# Altium PCB PCB1.pcbdoc
Units mil, origin at the board's own origin, x right, y up, seen from the top; angles counter-clockwise.
Board outline 6000 x 4000 mil, 2 copper layers (Top Layer, Bottom Layer); 16 components, 16 nets, 60 pads, 79 vias.
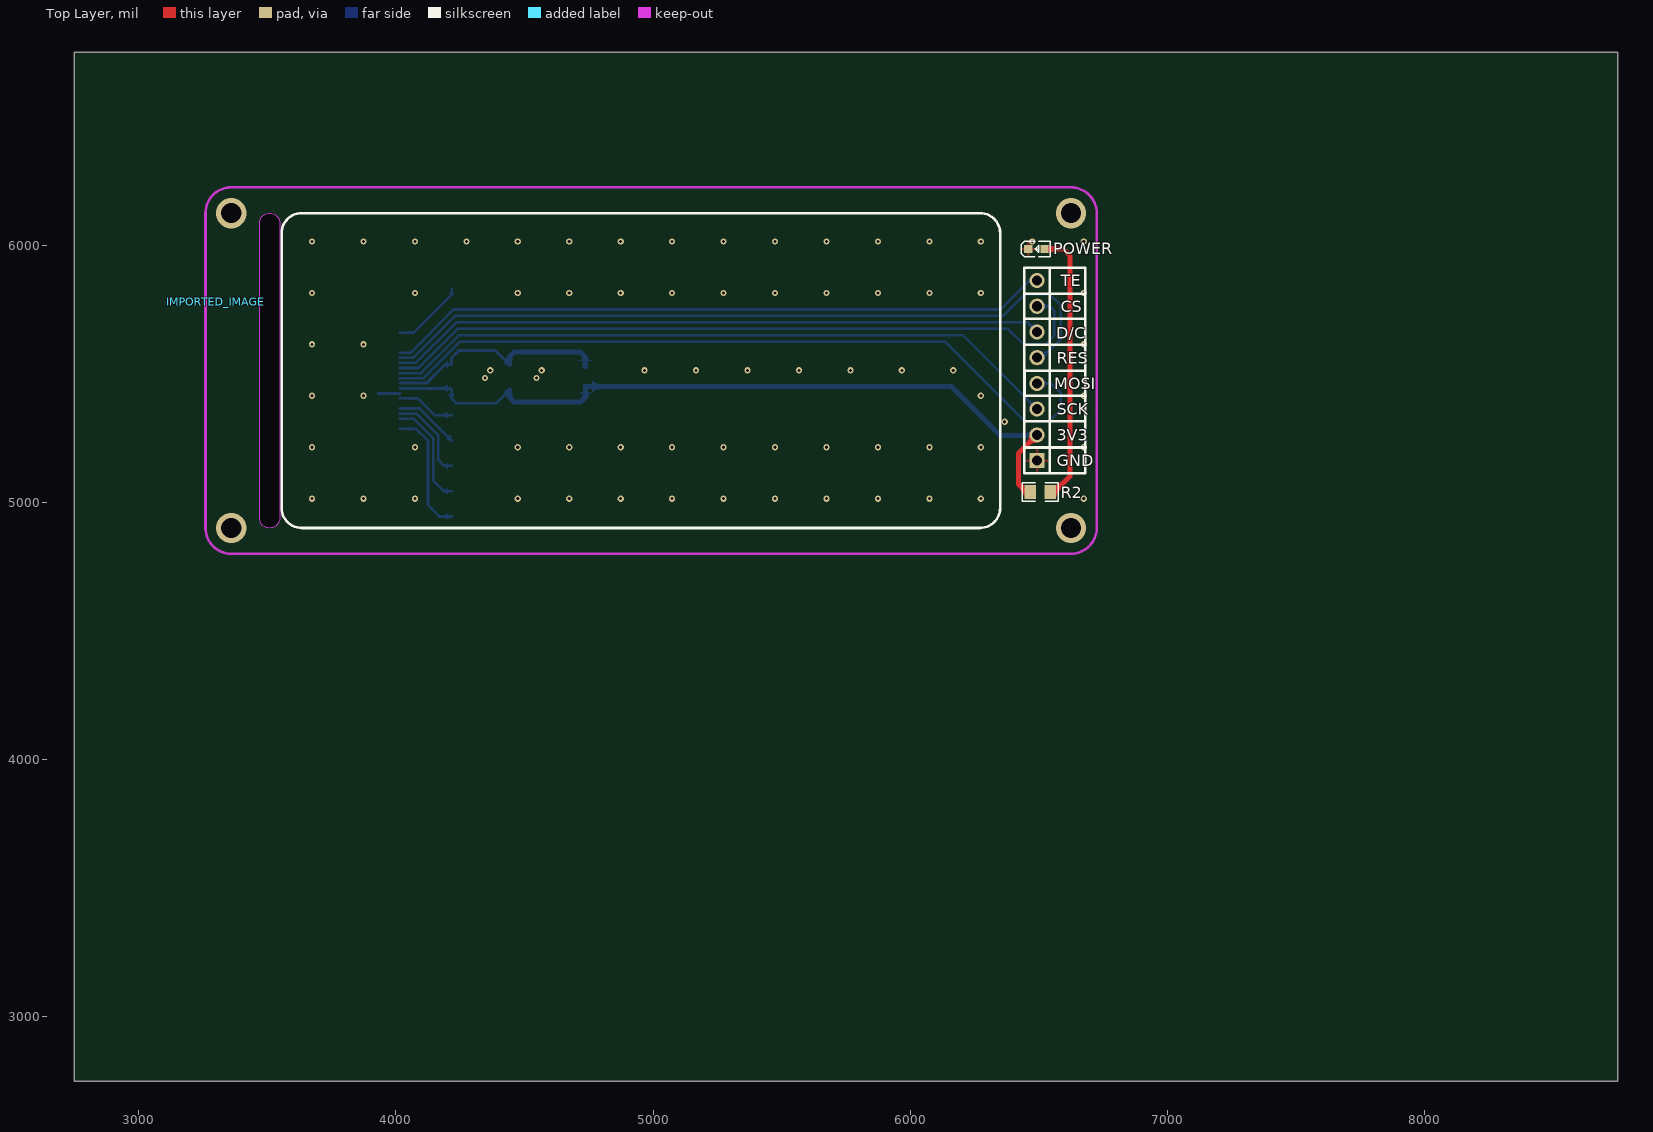
[diagram p0: Top Layer view]
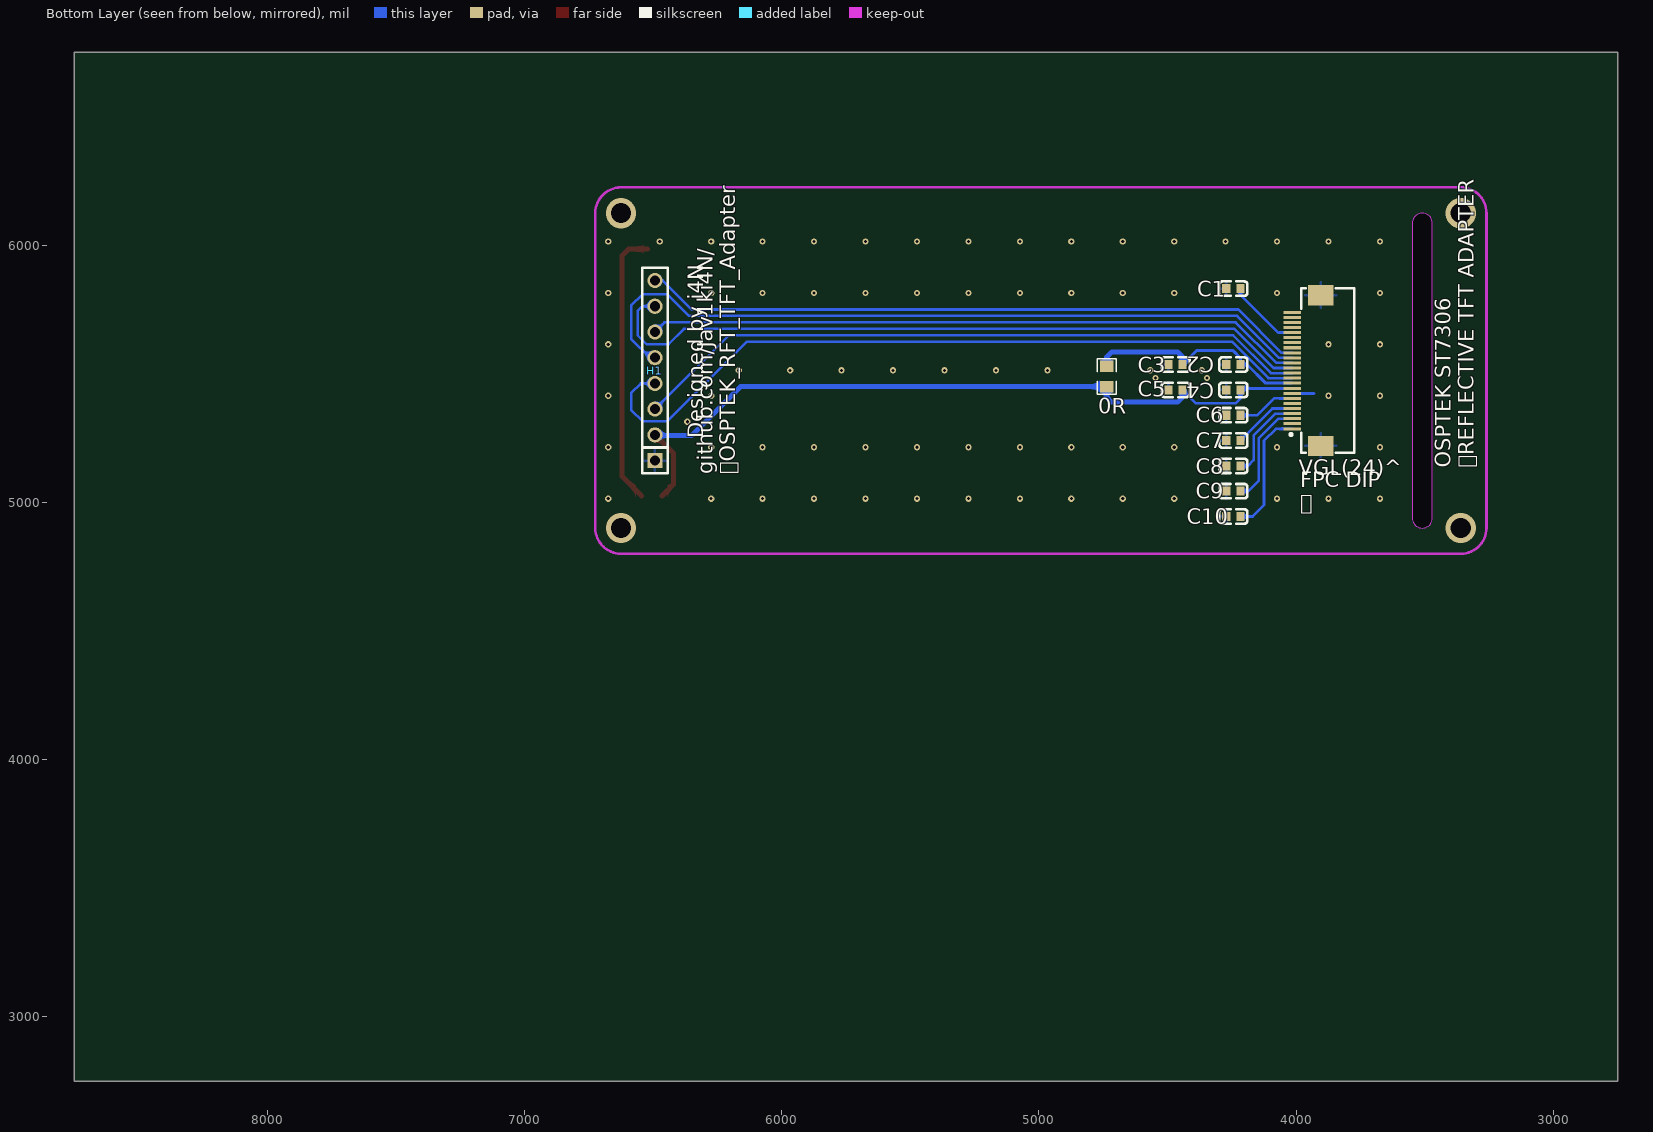
[diagram p1: Bottom Layer view, seen from below]

## Layer stack, top to bottom
Top Layer: signal copper (thickness not stored)
Dielectric: dielectric 12.6, FR-4, Dk 4.8
Bottom Layer: signal copper (thickness not stored)

## Board outline
8750,2750 2750,2750 2750,6750 8750,6750
cut-out: 3509.37,6125 cw(c3509.37,6085.63) 3548.74,6085.63 3548.74,4939.96 cw(c3509.37,4939.96) 3509.37,4900.59 cw(c3509.37,4939.96) 3470,4939.96 3470,6085.63 cw(c3509.37,6085.63)

## Design rules (kind name [scope] priority, off if disabled: settings)
Clearance copperThickness1oz [All] p1: gap=7 ignorepadtopadclearanceinfootprint=FALSE except(4: Track-Track; 6: Track-SMDPad SMDPad-SMDPad Track-THPad SMDPad-THPad THPad-THPad Track-Via SMDPad-Via THPad-Via Via-Via SMDPad-Fill THPad-Fill Via-Fill Fill-Fill Track-Region SMDPad-Region THPad-Region Via-Region Region-Region Track-Poly SMDPad-Poly THPad-Poly Via-Poly Fill-Poly Region-Poly Poly-Poly Track-Text SMDPad-Text THPad-Text Via-Text Fill-Text Region-Text Poly-Text Text-Text; 6.9: Track-Hole SMDPad-Hole THPad-Hole Via-Hole Fill-Hole Region-Hole Poly-Hole Text-Hole Sheet-Hole; 11.8: Track-Fill Fill-Region Track-Sheet SMDPad-Sheet THPad-Sheet Via-Sheet Fill-Sheet Region-Sheet Poly-Sheet Text-Sheet)
Clearance copperThickness2oz [All] p1: gap=7 ignorepadtopadclearanceinfootprint=FALSE except(6: Track-SMDPad SMDPad-SMDPad Track-THPad SMDPad-THPad THPad-THPad Track-Via SMDPad-Via THPad-Via Via-Via SMDPad-Fill THPad-Fill Via-Fill Fill-Fill Track-Region SMDPad-Region THPad-Region Via-Region Region-Region Track-Poly SMDPad-Poly THPad-Poly Via-Poly Fill-Poly Region-Poly Poly-Poly Track-Text SMDPad-Text THPad-Text Via-Text Fill-Text Region-Text Poly-Text Text-Text; 6.9: Track-Hole SMDPad-Hole THPad-Hole Via-Hole Fill-Hole Region-Hole Poly-Hole Text-Hole Sheet-Hole; 8: Track-Track; 11.8: Track-Fill Fill-Region Track-Sheet SMDPad-Sheet THPad-Sheet Via-Sheet Fill-Sheet Region-Sheet Poly-Sheet Text-Sheet)
DiffPairsRouting differentialPair [All] p1: maxuncoupledlength=10 maxlimit=6 mostfreqgap=6 toplayer_minwidth=5 toplayer_prefwidth=10 toplayer_maxwidth=100 bottomlayer_minwidth=5 bottomlayer_prefwidth=10 bottomlayer_maxwidth=100
PasteMaskExpansion pasteMaskExpansion [All] p1:
PlaneConnect innerPlane [All] p1: planeconnectstyle=Relief reliefexpansion=20 reliefentries=4 reliefconductorwidth=10 reliefairgap=10
PolygonConnect copperRegion [All] p1: connectstyle=Relief reliefentries=4 reliefconductorwidth=10 polygonreliefangle="90 Angle" airgapwidth=10
RoutingVias viaSize [All] p1: viastyle="Through Hole" holewidth=12.0078 minholewidth=11.811 maxholewidth=248.0314 width=24.0158 minwidth=19.685 maxwidth=393.7008
SolderMaskExpansion solderMaskExpansion [All] p1: useseparateexpansions=TRUE expansion=2 expansionbottom=2
Width copperThickness1oz [All] p1: maxlimit=100 minlimit=5 preferedwidth=10
Width copperThickness2oz [All] p1: maxlimit=100 minlimit=8 preferedwidth=10

## Components (designator, comment, footprint, x,y, rotation, side; value= is the part's Value field where it differs from the comment)
0R "0805W8F0000T5E" R0805 4736.38,5490 r270 bottom
C1 "CL10B105KA8NNNC" C0603 4244.25,5831.3 r0 bottom
C2 "0603B104K500NT" C0603 4244.25,5536.02 r0 bottom
C3 "CL10B105KA8NNNC" C0603 4468.66,5536.02 r0 bottom
C4 "0603B104K500NT" C0603 4244.25,5437.6 r0 bottom
C5 "CL10B105KA8NNNC" C0603 4468.66,5437.6 r0 bottom
C6 "CL10B105KA8NNNC" C0603 4244.25,5339.17 r0 bottom
C7 "CL10B105KA8NNNC" C0603 4244.25,5240.75 r0 bottom
C8 "CL10B105KA8NNNC" C0603 4244.25,5142.32 r0 bottom
C9 "CL10B105KA8NNNC" C0603 4244.25,5043.9 r0 bottom
C10 "CL10B105KA8NNNC" C0603 4244.25,4945.47 r0 bottom
"FPC DIP /  " "FPC-05F-24PH20" FPC-SMD_24P-P0.50_FPC-05F-24PH20 3955,5512.8 r90 bottom (schematic designator "FPC DIP")
H1 "B-2100S08P-A110" HDR-TH_8P-P2.54-V-M 6492.87,5512.8 r90 bottom
IMPORTED_IMAGE "IMPORTED_IMAGE" IMPORTED_IMAGE 3299.52,5780 r0 top
POWER "LTST-C191KSKT" LED0603-RD-YELLOW 6490,5985 r0 top
R2 "FRR0805J102 TS" R0805 6505,5040.59 r180 top

## Footprints (in the part's own frame and the unit in brackets; to place one, negate y for a bottom-side part, rotate by r counter-clockwise, add the part's x,y. Pads: shape width x height; smd on the part's side, far side on the other; paste and mask are expansions set on the pad)
C0603 [mm]
  rect 0.8x0.9 smd: 1(-0.7,0) 2(0.7,0)
  silkscreen extent -1.39,-0.71 1.39,0.71
FPC-SMD_24P-P0.50_FPC-05F-24PH20 [mm]
  rect 0.3x1.75 smd: 1(-5.753,1.537) 2(-5.25,1.537) 3(-4.75,1.537) 4(-4.25,1.537) 5(-3.75,1.537) 6(-3.25,1.537) 7(-2.75,1.537) 8(-2.25,1.537) 9(-1.75,1.537) 10(-1.25,1.537) 11(-0.75,1.537) 12(-0.25,1.537) 13(0.25,1.537) 14(0.75,1.537) 15(1.245,1.537) 16(1.753,1.537) 17(2.25,1.537) 18(2.75,1.537) 19(3.25,1.537) 20(3.75,1.537) 21(4.25,1.537) 22(4.75,1.537) 23(5.25,1.537) 24(5.75,1.537)
  rect 2x2.5 smd: 25(7.44,-1.288) 26(-7.44,-1.288)
  silkscreen extent -8.13,-4.57 8.13,1.78
HDR-TH_8P-P2.54-V-M [mm]
  rect 1.5x1.5 hole 1: 1(-8.89,0)
  round 1.5 hole 1: 2(-6.35,0) 3(-3.81,0) 4(-1.27,0) 5(1.27,0) 6(3.81,0) 7(6.35,0) 8(8.89,0)
  silkscreen extent -10.16,-1.27 10.16,1.27
IMPORTED_IMAGE [mil]
LED0603-RD-YELLOW [mm]
  rect 0.8x0.8 smd: 1(-0.799,-0.003) 2(0.799,0.003)
  silkscreen extent -1.49,-0.75 1.39,0.76
R0805 [mm]
  rect 1.133x1.377 smd: 1(-1,0) 2(1,0)
  silkscreen extent -1.76,-0.92 1.76,0.92

## Via types
v1: diameter 24.02, hole 12.01, Top Layer to Bottom Layer, 75 vias
v2: diameter 118.11, hole 78.74, Top Layer to Bottom Layer, 4 vias

## Nets (pads, with @x,y where several pads share a name; then routed paths per layer and width w, separated by ;. In a path a pad name is that pad's centre, name@x,y a point inside that pad or via, vN(x,y) a via of type N, cw(c..) or ccw(c..) an arc to the next point about the centre after c; other vN are vias at no path point)
$1N4245: POWER.2 R2.1 | length 1075.3
  Top Layer w19.68: POWER.2 6521.61,5985 6595,5985 6620,5960 6620,5100.63 R2.1@6544.37,5025
AVDD: "FPC DIP /  .4" C8.1 | length 341
  Bottom Layer w10: 4015.51,5345.47 4015.98,5345 4080,5345 4165,5260 4165,5165 4187.68,5142.32 C8.1
GND: 
IOVCC: 0R.1 "FPC DIP /  .10" C2.1 C3.1 | length 892.2
  Bottom Layer w11.81: 4015.51,5463.58 4118.58,5463.58 4191.02,5536.02 C2.1 4216.69,5561.69 4245,5590 4387.13,5590 C3.1
  Bottom Layer w19.68: C3.1 4441.1,5565.31 4460.79,5585 4716.69,5585 4736.38,5565.31 0R.1
LCD_CS: "FPC DIP /  .13" H1.7 | length 2816.4
  Bottom Layer w10: 4015.51,5522.63 4087.63,5522.63 4240,5675 6380,5675 6440,5615 6525,5615 6560,5650 6560,5745 6542.2,5762.8 H1.7
LCD_D/C: "FPC DIP /  .14" H1.6 | length 2558.1
  Bottom Layer w10: 4015.51,5542.32 4077.32,5542.32 4235,5700 6455.67,5700 H1.6
LCD_RES: "FPC DIP /  .15" H1.5 | length 2942.9
  Bottom Layer w10: 4015.51,5561.8 4066.8,5561.8 4230,5725 6360,5725 6445,5810 6540,5810 6585,5765 6585,5635.18 6512.62,5562.8 H1.5
LCD_SCLK: "FPC DIP /  .12" H1.3 | length 2657.2
  Bottom Layer w10: 4015.51,5502.95 4097.95,5502.95 4245,5650 6205,5650 6492.2,5362.8 H1.3
LCD_SDI: "FPC DIP /  .11" H1.4 | length 2948
  Bottom Layer w10: 4015.51,5483.26 4108.26,5483.26 4250,5625 6135,5625 6445,5315 6540,5315 6585,5360 6585,5425 6547.2,5462.8 H1.4
TE: "FPC DIP /  .16" H1.8 | length 2593.8
  Bottom Layer w10: 4015.51,5581.8 4056.8,5581.8 4225,5750 6350,5750 6462.8,5862.8 H1.8
VCC: 0R.2 "FPC DIP /  .9" C4.1 C5.1 H1.2 R2.2 | length 2997.4
  Top Layer w19.68: R2.2@6465.63,5025 6420,5070.63 6420,5190 H1.2@6492.8,5262.8
  Bottom Layer w10: C4.1 4216.69,5403.31 4235,5385 4388.5,5385 C5.1
  Bottom Layer w11.81: 4015.51,5443.89 4210.4,5443.89 C4.1
  Bottom Layer w19.68: C5.1 4441.1,5409.69 4460.79,5390 4717.81,5390 4737.5,5409.69 4737.5,5449.51 0R.2 6159.37,5450.63 6350,5260 6490.08,5260 H1.2
VCCIO: "FPC DIP /  .20" C1.1 | length 286.4
  Bottom Layer w10: 4015.51,5660.43 4070.43,5660.43 4216.69,5806.69 C1.1
VGH: "FPC DIP /  .7" C6.1 | length 228.2
  Bottom Layer w10: 4015.51,5404.52 4085.48,5404.52 4150.83,5339.17 C6.1
VGL: "FPC DIP /  .1" C10.1 | length 488.8
  Bottom Layer w10: 4015.5,5286.3 4078.7,5286.3 4125,5240 4125,4990 4169.53,4945.47 C10.1
VIV: "FPC DIP /  .5" C7.1 | length 252.7
  Bottom Layer w10: 4015.51,5365.15 4092.29,5365.15 C7.1
VNV: "FPC DIP /  .3" C9.1 | length 414.6
  Bottom Layer w10: 4015.51,5325.78 4069.22,5325.78 4145,5250 4145,5085 4186.1,5043.9 C9.1
pads on no net: "FPC DIP /  .2" "FPC DIP /  .6" "FPC DIP /  .8" "FPC DIP /  .17" "FPC DIP /  .18" "FPC DIP /  .19" "FPC DIP /  .21" "FPC DIP /  .22" "FPC DIP /  .23" "FPC DIP /  .24" "FPC DIP /  .25" "FPC DIP /  .26" C1.2 C2.2 C3.2 C4.2 C5.2 C6.2 C7.2 C8.2 C9.2 C10.2 H1.1 POWER.1
copper on no net: | length 85.5
  Bottom Layer w11.81: 3930,5424.21 4015.51,5424.21
  other v1: 3674.1,5014.69 3874.1,5014.69 4074.1,5014.69 4474.1,5014.69 4674.1,5014.69 4874.1,5014.69 5074.1,5014.69 5274.1,5014.69 5474.1,5014.69 5674.1,5014.69 5874.1,5014.69 6074.1,5014.69 6274.1,5014.69 6674.1,5014.69 3674.1,5214.69 4074.1,5214.69 4474.1,5214.69 4674.1,5214.69 4874.1,5214.69 5074.1,5214.69 5274.1,5214.69 5474.1,5214.69 5674.1,5214.69 5874.1,5214.69 6074.1,5214.69 6274.1,5214.69 6674.1,5214.69 6366.95,5313.66 3674.1,5414.69 3874.1,5414.69 6274.1,5414.69 6674.1,5414.69 4347.19,5483.94 4547.19,5483.94 4366.95,5513.66 4566.95,5513.66 4966.95,5513.66 5166.95,5513.66 5366.95,5513.66 5566.95,5513.66 5766.95,5513.66 5966.95,5513.66 6166.95,5513.66 3674.1,5614.69 3874.1,5614.69 6674.1,5614.69 3674.1,5814.69 4074.1,5814.69 4474.1,5814.69 4674.1,5814.69 4874.1,5814.69 5074.1,5814.69 5274.1,5814.69 5474.1,5814.69 5674.1,5814.69 5874.1,5814.69 6074.1,5814.69 6274.1,5814.69 6674.1,5814.69 3674.1,6014.69 3874.1,6014.69 4074.1,6014.69 4274.1,6014.69 4474.1,6014.69 4674.1,6014.69 4874.1,6014.69 5074.1,6014.69 5274.1,6014.69 5474.1,6014.69 5674.1,6014.69 5874.1,6014.69 6074.1,6014.69 6274.1,6014.69 6474.1,6014.69 6674.1,6014.69
  other v2: 3360,4900.59 6624.57,4900.59 3360,6125 6624.57,6125

## Polygon pours and split planes (outlines as drawn)
no net on Top Layer (solid, remove dead copper): 3000,4505 7020,4505 7020,6500 3000,6500
no net on Bottom Layer (solid, remove dead copper, pour order 2): 3055,4475 6825,4475 6825,6470 3055,6470

## Keep-outs
Board Outline Layer:
  lines w10: 3260,4900.59 ccw(c3360,4900.59) 3360,4800.59 6624.57,4800.59 ccw(c6624.57,4900.59) 6724.57,4900.59 6724.57,6125 ccw(c6624.57,6125) 6624.57,6225 3360,6225 ccw(c3360,6125) 3260,6125 3260,4900.59
Multi-Layer:
  region: 3509.37,6125 cw(c3509.37,6085.63) 3548.74,6085.63 3548.74,4939.96 cw(c3509.37,4939.96) 3509.37,4900.59 cw(c3509.37,4939.96) 3470,4939.96 3470,6085.63 cw(c3509.37,6085.63)

## Other copper
Top Layer:
  region net VCC: 6471.23,5227.31 6457.37,5241.29 6459.46,5243.77 6460.96,5246.36 6461.97,5249.06 6462.61,5251.89 6462.96,5254.85 6463.14,5257.93 6463.4,5264.49 6494.46,5233.31 6487.9,5233.07 6484.81,5232.9 6481.85,5232.54 6479.01,5231.91 6476.3,5230.9 6473.71,5229.4
  region net $1N4245: 6566.75,5994.84 6566.75,5975.16 ccw(c6566.75,5896.73) 6537.22,5969.39 6537.22,6000.88 ccw(c6566.75,6070.03)
  region net VCC: 6427.8,5048.91 6426.96,5077.59 ccw(c6455.19,5105.82) 6443.34,5067.7 6443.34,5022.69 ccw(c6384.34,5005.45)
  region net $1N4245: 6590.78,5085.33 6582.2,5048.91 ccw(c6625.66,5005.45) 6566.66,5022.69 6566.66,5067.7 ccw(c6521.93,5154.19)
Bottom Layer:
  region net VCC: 6454.69,5250.16 6450.52,5269.84 6452.15,5269.92 6453.71,5270.13 6456.64,5270.96 6459.37,5272.24 6461.93,5273.9 6464.35,5275.87 6466.67,5278.07 6471.19,5282.84 6475.36,5239.02 6470.26,5243.11 6467.97,5244.99 6465.71,5246.68 6463.36,5248.1 6460.82,5249.2 6457.97,5249.91
  region net LCD_SCLK: 6460.72,5387.21 6467.29,5394.78 6468.93,5393.28 6470.49,5392.12 6472,5391.27 6473.47,5390.69 6474.91,5390.34 6476.35,5390.2 6479.28,5390.37 6482.38,5390.95 6485.79,5391.64 6489.63,5392.18 6491.76,5392.31 6494.04,5392.3 6463.42,5360.68 6463.34,5362.99 6463.41,5365.13 6463.89,5368.96 6465.14,5375.35 6465.33,5378.2 6465.19,5379.61 6464.85,5381.03 6464.27,5382.48 6463.41,5383.98 6462.24,5385.55
  region net LCD_SDI: 6533.23,5467.8 6533.23,5457.8 6531,5457.7 6529.07,5457.41 6527.4,5456.95 6525.95,5456.33 6524.7,5455.56 6523.59,5454.66 6521.68,5452.48 6518.01,5447.03 6515.65,5443.96 6514.22,5442.38 6512.56,5440.79 6512.56,5484.8 6514.22,5483.21 6515.65,5481.63 6518.01,5478.56 6521.68,5473.11 6523.59,5470.93 6524.7,5470.03 6525.95,5469.26 6527.4,5468.64 6529.07,5468.18 6531,5467.89
  region net LCD_RES: 6533.45,5590.7 6530.77,5573.88 6529.48,5572.47 6528.34,5571 6526.45,5567.89 6524.96,5564.61 6523.7,5561.21 6521.31,5554.24 6519.87,5550.78 6518.08,5547.41 6505.36,5589.55 6508.91,5588.08 6512.62,5586.91 6516.4,5586.14 6520.16,5585.83 6523.83,5586.06 6525.61,5586.39 6527.33,5586.89 6528.98,5587.56 6530.56,5588.42 6532.05,5589.46
  region net LCD_D/C: 6460.8,5687.79 6467.87,5694.87 6469.52,5693.36 6471.09,5692.19 6472.59,5691.34 6474.05,5690.76 6475.49,5690.41 6476.91,5690.27 6479.8,5690.45 6486.25,5691.71 6490.09,5692.22 6492.22,5692.32 6494.52,5692.28 6463.39,5661.15 6463.35,5663.45 6463.45,5665.58 6463.96,5669.42 6465.21,5675.87 6465.4,5678.76 6465.26,5680.18 6464.91,5681.62 6464.33,5683.08 6463.48,5684.58 6462.31,5686.15
  region net LCD_CS: 6533.23,5767.8 6533.23,5757.8 6531,5757.7 6529.07,5757.41 6527.4,5756.95 6525.95,5756.33 6524.7,5755.56 6523.59,5754.66 6521.68,5752.48 6518.01,5747.03 6515.65,5743.96 6514.22,5742.38 6512.56,5740.79 6512.56,5784.8 6514.22,5783.21 6515.65,5781.63 6518.01,5778.56 6521.68,5773.11 6523.59,5770.93 6524.7,5770.03 6525.95,5769.26 6527.4,5768.64 6529.07,5768.18 6531,5767.89
  region net TE: 6462.8,5857.8 6462.8,5867.8 6463.91,5867.94 6464.88,5868.35 6465.72,5869 6466.44,5869.85 6467.63,5872.06 6468.6,5874.7 6469.49,5877.55 6470.46,5880.35 6471.64,5882.85 6472.36,5883.91 6473.19,5884.8 6473.19,5840.79 6472.36,5841.68 6471.64,5842.74 6470.46,5845.24 6469.49,5848.04 6468.6,5850.89 6467.63,5853.53 6466.44,5855.74 6465.72,5856.59 6464.88,5857.24 6463.91,5857.65
  region net VCC: 4747.34,5409.69 4727.66,5409.69 ccw(c4708.49,5409.69) 4712.89,5428.34 4762.11,5428.34 ccw(c4766.51,5409.69)
  region net VCC: 4793.01,5460.47 4793.01,5440.79 ccw(c4793.01,5399.55) 4763.48,5428.34 4763.48,5472.92 ccw(c4793.01,5501.71)
  region net IOVCC: 4726.54,5565.31 4746.22,5565.31 ccw(c4760.98,5566.47) 4760.98,5551.66 4711.77,5551.66 ccw(c4711.77,5566.47)
  region net VGL: 4064.95,5291.3 4064.95,5281.3 ccw(c4064.95,5156.6) 4049.95,5280.39 4049.95,5292.2 ccw(c4064.95,5415.99)
  region net VGH: 4064.96,5409.52 4064.96,5399.52 ccw(c4064.96,5274.83) 4049.96,5398.61 4049.96,5410.43 ccw(c4064.96,5534.21)
  region net VCCIO: 4064.96,5665.43 4064.96,5655.43 ccw(c4064.96,5530.74) 4049.96,5654.52 4049.96,5666.34 ccw(c4064.96,5790.12)
  region net VCCIO: 4221.69,5806.69 4211.69,5806.69 ccw(c4204.19,5806.06) 4204.19,5813.58 4229.19,5813.58 ccw(c4229.19,5806.06)
  region net IOVCC: 4191.02,5530.12 4191.02,5541.93 ccw(c4191.02,5551.91) 4200.94,5550.79 4200.94,5521.26 ccw(c4191.02,5520.13)
  region net IOVCC: 4419.09,5549.68 4425.47,5560 ccw(c4444.26,5585.06) 4444.27,5553.74 4425.35,5530.89 ccw(c4394.04,5530.89)
  region net IOVCC: 4431.26,5565.31 4450.94,5565.31 ccw(c4465.24,5565.31) 4456.85,5553.74 4425.35,5553.74 ccw(c4416.96,5565.31)
  region net VCC: 4183.23,5437.98 4183.23,5449.8 ccw(c4183.23,5480.99) 4200.94,5455.31 4200.94,5429.13 ccw(c4183.23,5415.84)
  region net VCC: 4221.69,5404.88 4211.69,5404.88 ccw(c4192.94,5404.88) 4204.19,5419.88 4229.19,5419.88 ccw(c4240.44,5404.88)
  region net VCC: 4425.15,5414.58 4420.05,5423.62 ccw(c4398.84,5439.53) 4425.35,5439.53 4441.06,5419.88 ccw(c4441.06,5393.37)
  region net VCC: 4450.94,5409.69 4431.26,5409.69 ccw(c4419.5,5409.69) 4425.35,5419.88 4456.85,5419.88 ccw(c4462.7,5409.69)
  region net VGH: 4185.94,5334.17 4185.94,5344.17 ccw(c4185.94,5362.92) 4200.94,5351.67 4200.94,5326.67 ccw(c4185.94,5315.42)
  region net VIV: 4195.64,5254.73 4200.74,5263.77 ccw(c4216.65,5284.98) 4216.65,5258.46 4200.94,5238.82 ccw(c4174.43,5238.82)
  region net AVDD: 4187.68,5137.32 4187.68,5147.32 ccw(c4187.68,5162.81) 4200.94,5154.82 4200.94,5129.82 ccw(c4187.68,5121.84)
  region net VNV: 4186.1,5038.9 4186.1,5048.9 ccw(c4186.1,5067.33) 4200.94,5056.4 4200.94,5031.4 ccw(c4186.1,5020.46)
  region net VGL: 4185.94,4940.47 4185.94,4950.47 ccw(c4185.94,4969.22) 4200.94,4957.97 4200.94,4932.97 ccw(c4185.94,4921.72)

## Silkscreen, mask and mechanical layers (free items; w line width, h text height)
Top Silkscreen Layer:
  lines w10: 6442.87,5811.54 6676.54,5811.54 6680,5815 6680,5714.51 6442.87,5714.51 6442.87,5612.99 6677.99,5612.99 6680,5615 6680,5512.8 6447.2,5512.8 6445,5515 6445,5414.84 6680.67,5414.84 6680.67,5314.87 6443.66,5314.87 6443.66,5213.72 6680.93,5213.72 ; 6442.87,5912.79 6442.87,5112.8 6542.87,5112.8 ; 6443.66,5912.79 6542.87,5912.79 ; 6542.87,5112.8 6542.87,5912.79 ; 6542.87,5112.8 6680.67,5112.8 6680.67,5912.79 6542.87,5912.79 ; 3555.98,4979.33 ccw(c3634.72,4979.33) 3634.72,4900.59 6270.55,4900.59 ccw(c6270.55,4979.33) 6349.29,4979.33 6349.29,6046.26 ccw(c6270.55,6046.26) 6270.55,6125 3634.72,6125 ccw(c3634.72,6046.26) 3555.98,6046.26 3555.98,4979.33
  text "TE" at 6585,5840 h45
  text "CS" at 6585,5740 h45
  text "D/C" at 6567.56,5636.13 h45
  text "RES" at 6570,5540 h45
  text "MOSI" at 6560,5440 h45
  text "SCK" at 6570,5340 h45
  text "3V3" at 6570,5240 h45
  text "GND" at 6570,5140 h45
Bottom Silkscreen Layer:
  text "Designed by i4N" at 6305,5250 h59.06 r270
  text "OSPTEK ST7306 /  REFLECTIVE TFT ADAPTER" at 3310,5135 h59.06 r270
  text "github.com/Jav1ki4N/ /  OSPTEK_RFT_TFT_Adapter" at 6180,5110 h59.06 r270
  text "VGL(24)^" at 3990,5105 h59.06
Mechanical Layer:
  lines w1: 3509.37,4900.59 ccw(c3509.37,4939.96) 3548.74,4939.96 3548.74,6085.63 ccw(c3509.37,6085.63) 3509.37,6125 ; 3509.37,4900.59 3509.37,4900.59 ; 3509.37,4900.59 cw(c3509.37,4939.96) 3470,4939.96 3470,6085.63 cw(c3509.37,6085.63) 3509.37,6125 ; 3509.37,6125 3509.37,6125
Mech6:
  text "PCB Width = FR-4 width + EVA form width /  = 2.6mm" at 3250,4485 h100
  text "Length of FPC inserted in the dip /  = 3.5mm" at 3250,4235 h100
  text "MAX Avaliable FPC length /  = 14.3 - (3.14*2.6*0.5) - 3.5 /  = 6.718mm" at 3250,3880 h100
  text "MIN Avaliable FPC length is when the  /  radius  = 2mm, as it's the length of the /  open area. /   /  Result: 4.52mm" at 3250,3290 h100
  text "(MAX+MIN)/2 = 5.619mm /  Take this as the FPC length for application" at 3250,3000 h100